# Altium PCB tuch-tara2.PcbDoc
Units mm, origin at the board's own origin, x right, y up, seen from the top; angles counter-clockwise.
Board outline 151 x 86.38 mm, 2 copper layers (Top Layer, Bottom Layer); 25 components, 18 nets, 78 pads, 0 vias.
Unrouted connection lines stored in the file: 6.
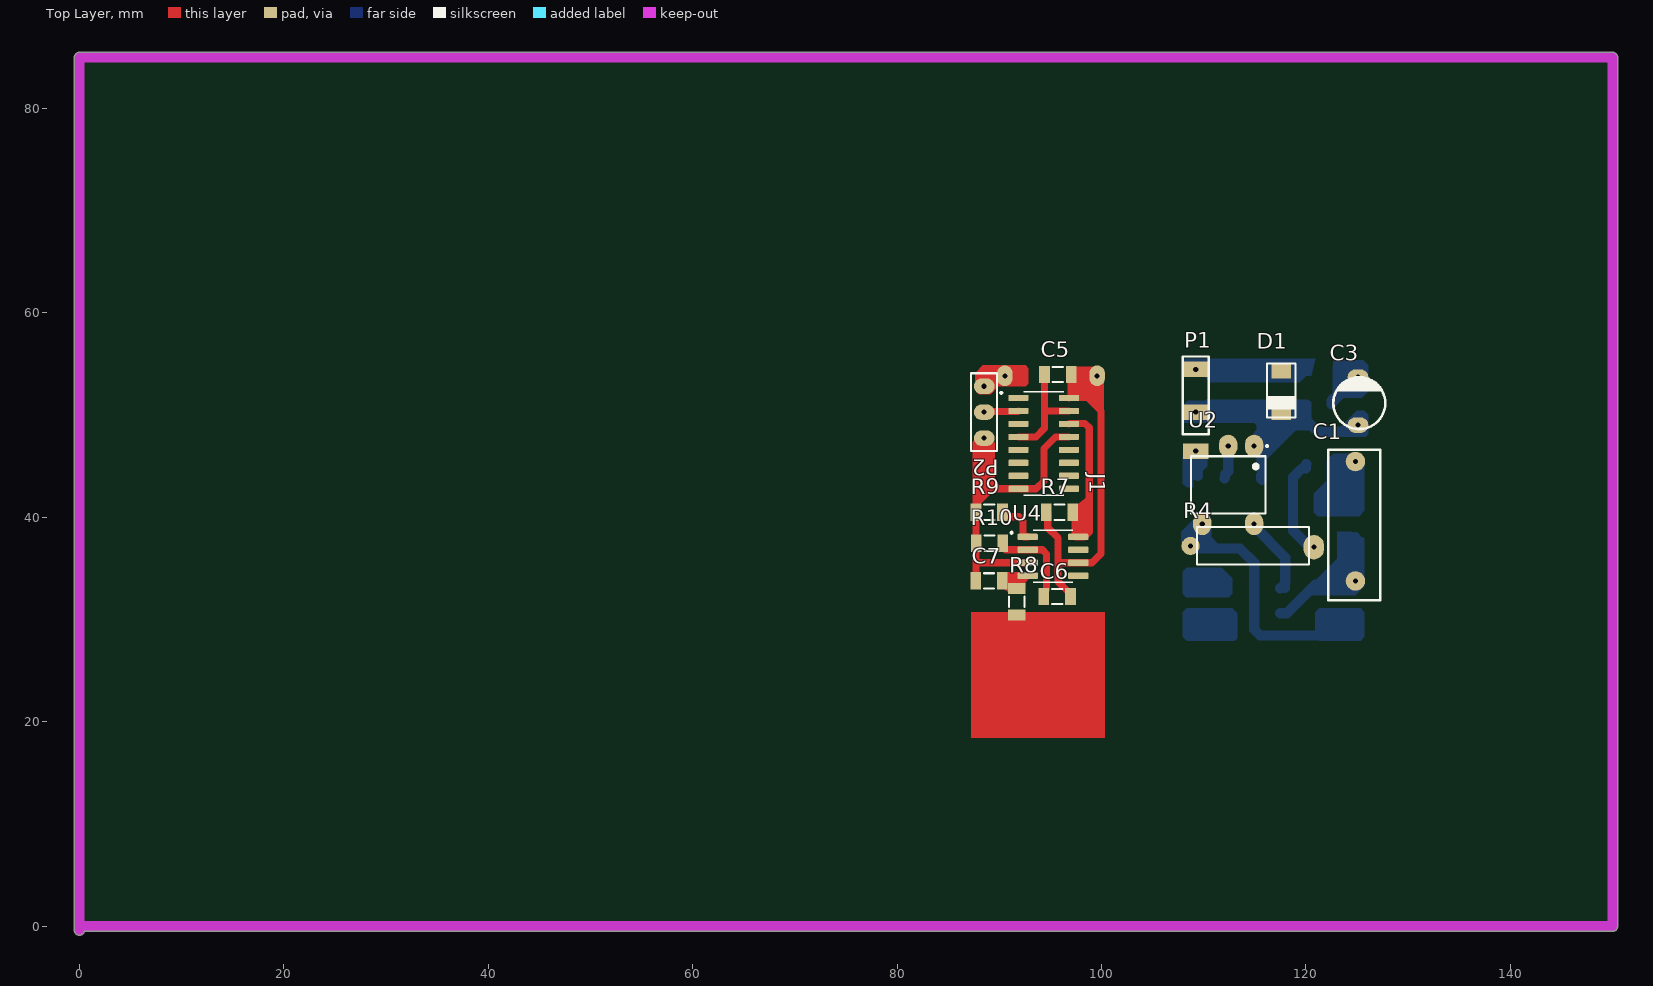
[diagram p0: Top Layer view]
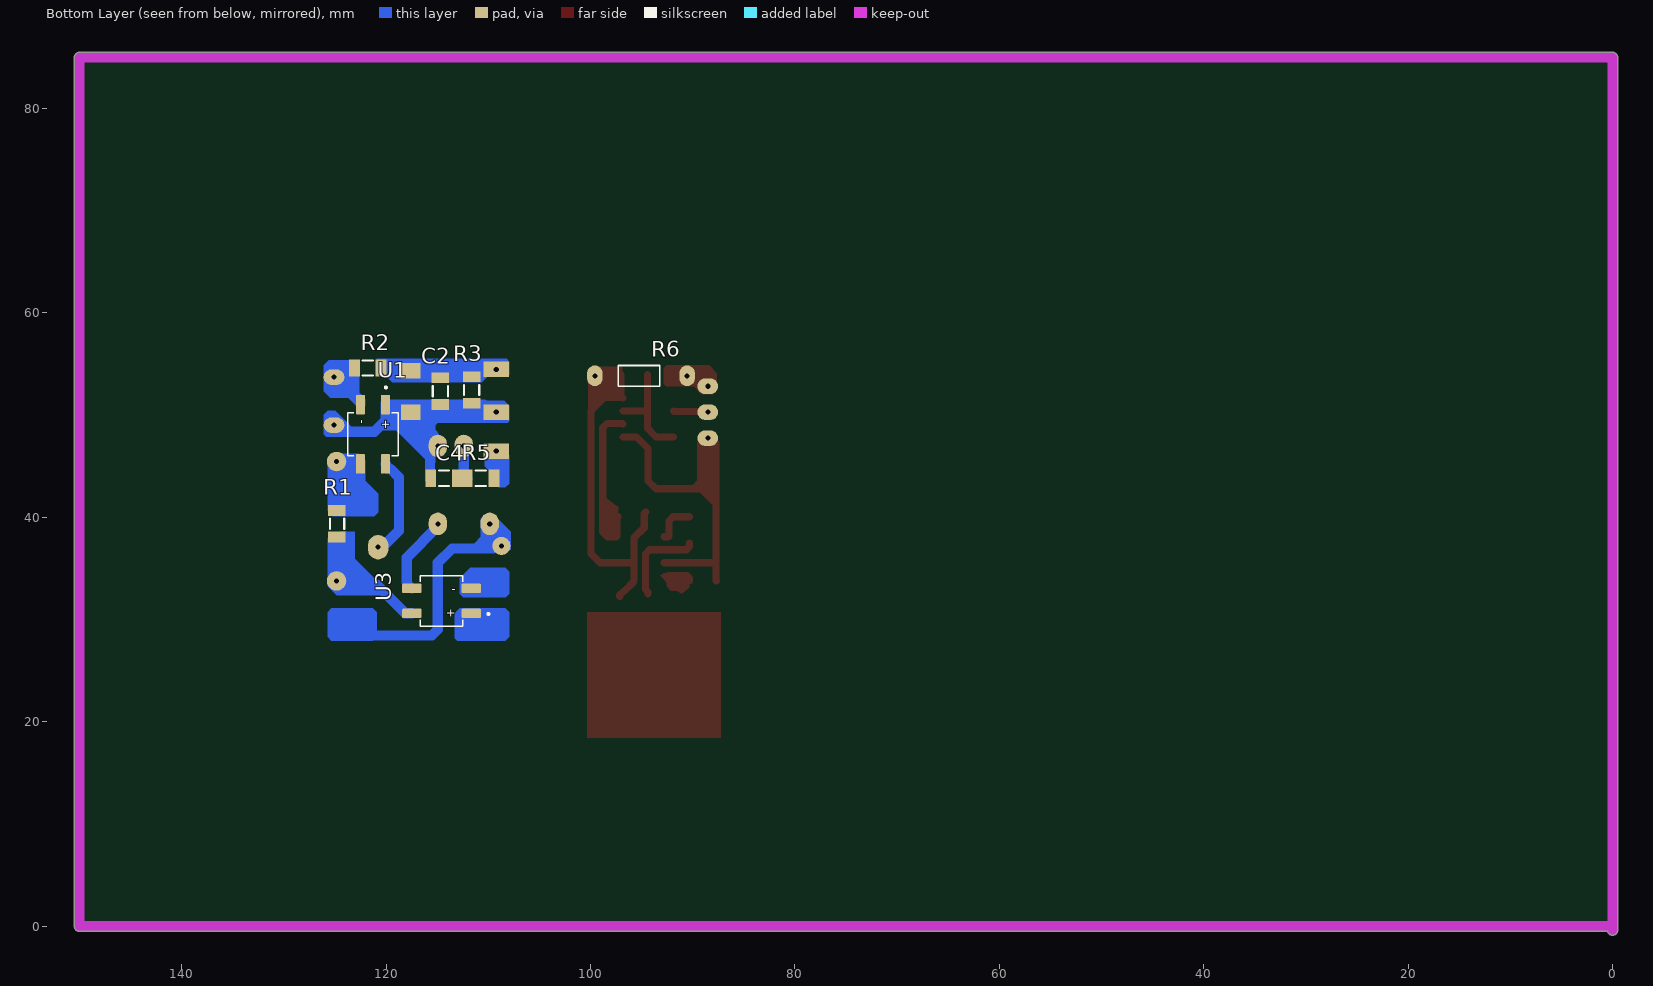
[diagram p1: Bottom Layer view, seen from below]
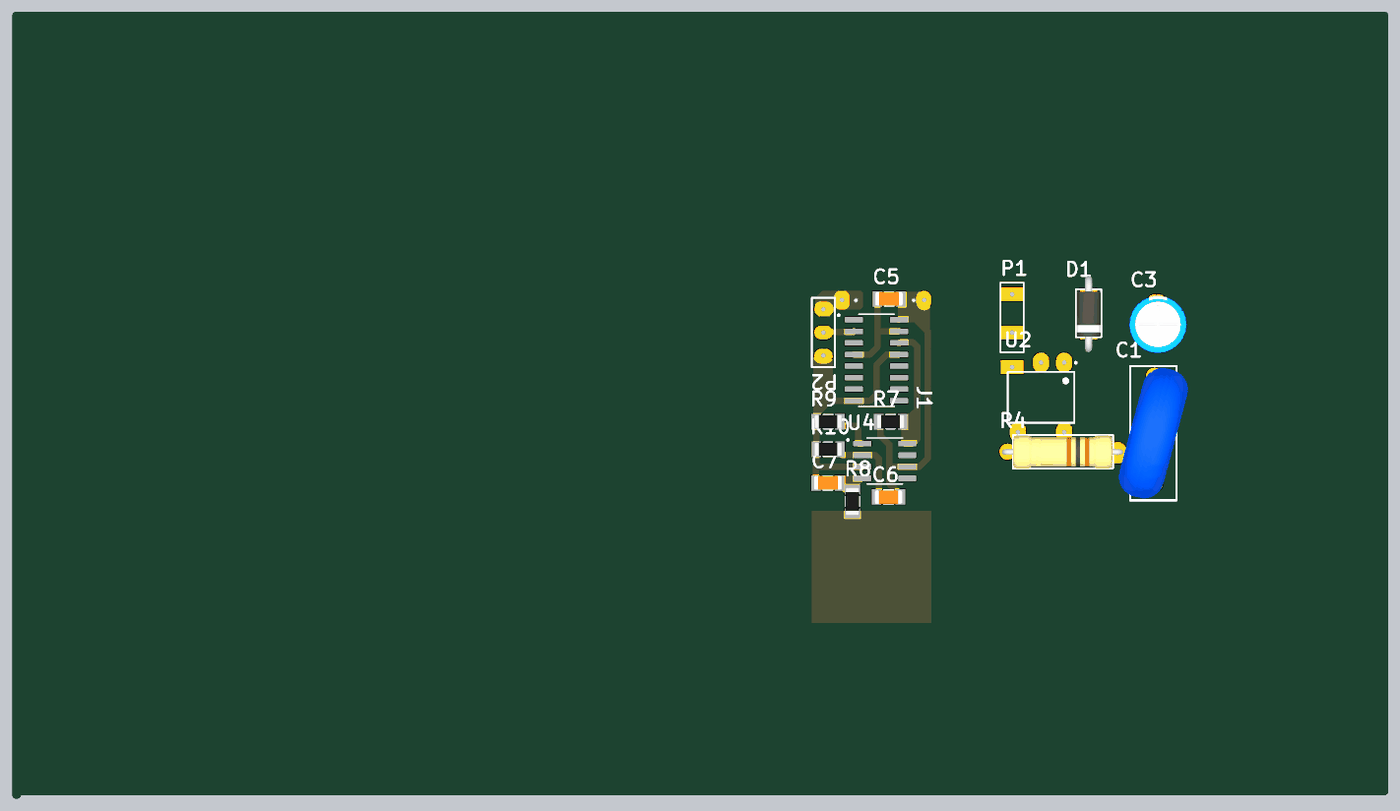
[diagram p2: 3D render of the assembled board from above, using the file's embedded part models]
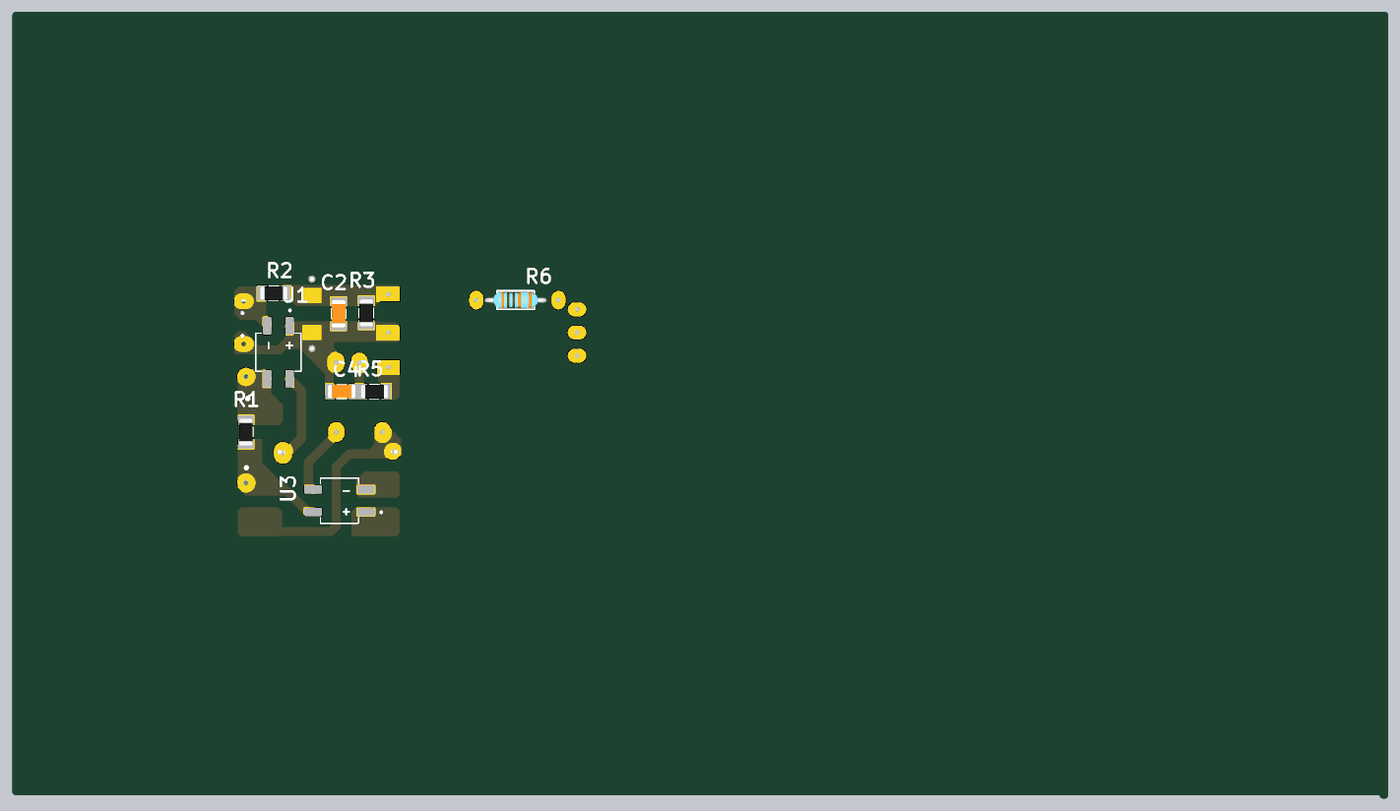
[diagram p3: 3D render of the assembled board from below, using the file's embedded part models]

## Layer stack, top to bottom
Top Solder: solder mask 0.0102, Solder Resist, Dk 3.5
Top Layer: signal copper 0.0356
Dielectric 1: dielectric 0.32, FR-4, Dk 4.8
Bottom Layer: signal copper 0.0356
Bottom Solder: solder mask 0.0102, Solder Resist, Dk 3.5

## Board outline
-0.5,-0.381 -0.5,85 cw(c0,85) 0,85.5 150,85.5 cw(c150,85) 150.5,85 150.5,0 cw(c150,0) 150,-0.5 0.486,-0.5 cw(c0,-0.381)

## Design rules (kind name [scope] priority, off if disabled: settings)
Clearance Clearance_1 [InPolygon] p1: gap=0.8 ignorepadtopadclearanceinfootprint=FALSE
Clearance [All] p2: gap=0.254 ignorepadtopadclearanceinfootprint=FALSE except(0: Arc-Hole Track-Hole SMDPad-Hole THPad-Hole Via-Hole Fill-Hole Poly-Hole Region-Hole Text-Hole)
PolygonConnect [All] p1: connectstyle=Relief reliefconductorwidth=0.254 reliefentries=4 polygonreliefangle="90 Angle" airgapwidth=0.254
RoomDefinition tuch-tara2 [InComponentClass('tuch-tara2')] p1: confinementstyle=ConfineIn formatcopy=TRUE lockcomponents=FALSE outline 144.907,-4.953 247.904,-4.953 247.904,23.114 144.907,23.114
RoutingLayers [All] p1: top layer_v5=FALSE bottom layer_v5=TRUE
RoutingVias [All] p1: holewidth=0.711 width=2.5 viastyle="Through Hole" minholewidth=0.711 minwidth=1.27 maxholewidth=0.711 maxwidth=2
SolderMaskExpansion [All] p1: expansion=0.102 istentingtop=FALSE
Width [All] p1: maxlimit=3 minlimit=0.5 preferedwidth=1
29 further rules are at their usual default settings.

## Components (designator, comment, footprint, x,y, rotation, side; value= is the part's Value field where it differs from the comment)
C1 "=Value" CAP-30 124.714,39.243 r90 top
C2 "=Value" "CAP 1206" 114.681,52.324 r90 bottom
C3 "=Value" ELEC-CAP-RAD10-20 125.222,51.181 r270 top
C4 "=Value" "CAP 1206" 114.3,43.815 r0 bottom
C5 "=Value" "CAP 1206" 95.758,53.975 r180 top
C6 "=Value" "CAP 1206" 95.631,32.258 r0 top
C7 "=Value" "CAP 1206" 89.027,33.782 r180 top
D1 "MODEL" DO-41 117.602,56.134 r270 top
J1 "-4017" SOIC127P600X175-16N 94.336,47.244 r0 top
P1 "Header 3" HDR1X3#1 109.22,54.483 r270 top
P2 "Header 3" HDR1X3#2 88.519,52.832 r270 top
R1 "10K" "RES 1206 (3216X08L)" 124.841,39.37 r270 bottom
R2 "10K" "RES 1206 (3216X08L)" 121.793,54.61 r180 bottom
R3 "10K" "RES 1206 (3216X08L)" 111.633,52.451 r90 bottom
R4 "10K" Res-(1/1) 121.158,37.211 r180 top
R5 "10K" "RES 1206 (3216X08L)" 110.744,43.815 r0 bottom
R6 "10K" Res-(1/4) 95.25,53.848 r180 bottom
R7 "10K" "RES 1206 (3216X08L)" 95.885,40.513 r0 top
R8 "10K" "RES 1206 (3216X08L)" 91.694,31.75 r90 top
R9 "10K" "RES 1206 (3216X08L)" 89.027,40.513 r180 top
R10 "10K" "RES 1206 (3216X08L)" 89.027,37.465 r0 top
U1 "MB6S" SOIC245P670X270-4N 121.285,48.133 r270 bottom
U2 "K3021P" DIP762W50P254L730H410Q6 112.395,43.18 r270 top
U3 "MB6S" SOIC245P670X270-4N 114.575,31.832 r0 bottom
U4 "LM555CM/NOPB" SOIC127P599X175-8N 95.25,36.195 r0 top

## Footprints (in the part's own frame and the unit in brackets; to place one, negate y for a bottom-side part, rotate by r counter-clockwise, add the part's x,y. Pads: shape width x height; smd on the part's side, far side on the other; paste and mask are expansions set on the pad)
"CAP 1206" [mm]
  rect 1.05x1.7 smd: 1(-1.27,0) 2(1.326,0)
  silkscreen extent -0.47,-0.75 0.53,0.75, body extent -1.49,-0.77 1.55,0.75, height 0.75
CAP-30 [mil]
  round 75 hole 19.68: 1(-215,-5) 2(245,-5)
  silkscreen extent -290,-100 290,100, body extent -301,-169 301,169, height 707
DIP762W50P254L730H410Q6 [mm]
  oval 2.2x1.79 hole 0.5: 1(-3.81,2.54) 2(-3.81,0) 4(3.81,-2.54) 6(3.81,2.54)
  silkscreen extent -3.9,-3.65 2.8,3.9
DO-41 [mm]
  rect 1.5x1.905 all layers, no hole: 1(1.778,0) 2(5.842,0)
  silkscreen extent 1.1,-1.5 6.35,1.5, body extent -0.41,-1.33 8,1.33, height 3.33
ELEC-CAP-RAD10-20 [mil]
  oval 60x80 hole 19.68: 1(-100,-5) 2(84.65,-5)
  silkscreen extent -100,-100 100,100, body extent -124,-124 124,124, height 404
HDR1X3#1 [mm] "Connector; Header; 3 Position"
  rect 1.524x2.5 hole 0.5: 1(0,0) 2(8.001,0) 3(4.191,0)
  silkscreen extent -1.27,-1.27 6.35,1.27
HDR1X3#2 [mm] "Connector; Header; 3 Position"
  oval 1.524x2.032 hole 0.5: 1(0,0) 2(2.54,0) 3(5.08,0)
  silkscreen extent -1.27,-1.27 6.35,1.27
"RES 1206 (3216X08L)" [mm] "Chip Resistor, 2-Leads, Body 3.2x1.6mm, IPC High Density _ (0.125 W)"
  rect 1.05x1.7 smd: 1(-1.295,0) 2(1.301,0)
  silkscreen extent -0.51,-0.64 0.5,0.75, body extent -1.52,-0.76 1.53,0.76, height 0.6
Res-(1/1) [mil]
  oval 78.74x94.49 hole 19.68: 1(15,5)
  round 70 hole 19.68: 2(490,0)
  silkscreen extent 34,-72 466,72, body extent -11,-71 514,73, height 151
Res-(1/4) [mil]
  oval 60x80 hole 19.68: 1(-170,0) 2(185,0)
  silkscreen extent -80,-40 80,40, body extent -135,-36 135,36, height 115
SOIC127P599X175-8N [mm]
  rrect25% 1.97x0.6 smd: 1(-2.47,1.905) 2(-2.47,0.635) 3(-2.47,-0.635) 4(-2.47,-1.905) 5(2.47,-1.905) 6(2.47,-0.635) 7(2.47,0.635) 8(2.47,1.905)
  silkscreen extent -4.14,-2.52 1.95,2.52
SOIC127P600X175-16N [mm]
  rrect25% 1.97x0.6 smd: 1(-2.475,4.445) 2(-2.475,3.175) 3(-2.475,1.905) 4(-2.475,0.635) 5(-2.475,-0.635) 6(-2.475,-1.905) 7(-2.475,-3.175) 8(-2.475,-4.445) 9(2.475,-4.445) 10(2.475,-3.175) 11(2.475,-1.905) 12(2.475,-0.635) 13(2.475,0.635) 14(2.475,1.905) 15(2.475,3.175) 16(2.475,4.445)
  silkscreen extent -4.24,-5.06 1.95,5.06
SOIC245P670X270-4N [mm]
  rrect23% 1.91x0.91 smd: 1(-2.9,1.225) 2(-2.9,-1.225) 3(2.9,-1.225) 4(2.9,1.225)
  silkscreen extent -4.68,-2.48 2.1,2.48

## Part data
C1 C2 C4 C5 C6 C7: library part Capacitor, "Capacitor"
C3: library part "Capacitor Electrolytic", "Electrolytic Capacitor"
D1: library part Diode, "Diode", MODEL=1N4148
J1: "10000pF Â±1% 25V Ceramic Capacitor C0G, NP0 0603 (1608 Metric)", Package="0603 Heyco", Availability=Warning, MF=Heyco, Mouser-Purchase-URL=https://snapeda.com/shop?store=Mouser&id=51486, MP=4017, Price=None, SnapEDA_Link=https://www.snapeda.com/parts/4017/Heyco/view-part/51486/?ref=snap
P1 P2: "Header, 3-Pin", LatestRevisionDate=17-Jul-2002, LatestRevisionNote="Re-released for DXP Platform.", Publisher="Altium Limited"
R1 R2 R3 R4 R5 R6 R7 R8 R9 R10: library part Resistor, "Resistor", Power="1/4 W", Tolerance=5%
U1 U3: "Bridge Rectifier Single Phase Standard 600V Surface Mount 4-SOIC", Package="BESOP-4 Surge Components", Digi-Key_Part_Number=MB6SCT-ND, Digi-Key_Purchase_URL=https://www.digikey.com.tr/product-detail/en/on-semiconductor/MB6S/MB6SCT-ND/965654?utm_source=snapeda&utm_medium=aggregator&utm_campaign=symbol, MF="ON Semiconductor", MP=MB6S, SnapEDA_Link=https://www.snapeda.com/parts/MB6S/ON%20Semiconductor/view-part/2774209/?ref=snap
U2: "Optoisolator Triac Output 5300Vrms 1 Channel 6-DIP", Package="DIP-6 Vishay", Availability=Unavailable, DigiKey-Purchase-URL=https://snapeda.com/shop?store=DigiKey&id=291595, MF="Vishay Semiconductor", Mouser-Purchase-URL=https://snapeda.com/shop?store=Mouser&id=291595, MP=K3021P, Price=None, SnapEDA_Link=https://www.snapeda.com/parts/K3021P/Vishay%20Semiconductor%20Opto%20Division/view-part/291595/?ref=snap
U4: "Highly Stable 555 Timer 8-SOIC 0 to 70", Package=None, Availability=Unavailable, MP=LM555CM/NOPB, Price=None

## Nets (pads, with @x,y where several pads share a name; then routed paths per layer and width w, separated by ;. In a path a pad name is that pad's centre, name@x,y a point inside that pad or via, vN(x,y) a via of type N, cw(c..) or ccw(c..) an arc to the next point about the centre after c; other vN are vias at no path point)
faz: R4.2 U2.4 | length 25.5
  Bottom Layer w1: R4.2 108.861,37.062 109.411,37.062 109.516,36.957 113.538,36.957 114.935,35.56 114.935,29.034 115.521,28.448 124.956,28.448 ; R4.2@108.861,37.957 109.855,38.951 U2.4
GND: C2.2 C7.2 D1.1 J1.8 J1.13 P1.1 P2.3 R2.2 R3.2 R9.2 R10.1 U4.3 | length 45.3
  Top Layer w0.7: C7.2 87.716,33.797 87.716,35.56 ; 87.726,35.853 R10.1@87.726,37.46 ; 87.726,42.605 87.726,40.259 R10.1@87.726,37.46 ; P2.3@87.726,47.278 87.726,42.799 J1.8 93.599,42.799 94.361,43.561 94.361,46.736 95.504,47.879 J1.13 ; R10.1 R10.1@87.726,37.46 ; U4.3 87.716,35.56 ; 87.716,35.56 87.716,35.853 87.716,37.45 R10.1@87.726,37.46
  Bottom Layer w1: P1.1@109.22,54.61 112.395,54.61 ; R3.2 119.149,53.752 120.134,54.737 R2.2@120.138,54.733 ; D1.1@117.475,54.737 D1.1@117.602,54.737
NetC1_2: C1.2 R1.1 U1.3 | length 7.3
  Bottom Layer w1: U1.3 122.51,45.304 122.555,45.35 124.725,45.35 C1.2 R1.1
NetC3_1: C3.1 R2.1 U1.2 | length 6.4
  Bottom Layer w1: U1.2 122.51,51.443 123.088,52.021 R2.1 123.088,54.285 123.113,54.26 123.438,54.26 123.877,53.821 124.995,53.821 C3.1
NetC4_1: C4.1 R5.2 U2.2 | length 3.3
  Bottom Layer w1: R5.2 112.07,43.84 112.07,44.165 112.395,44.49 U2.2
NetC5_2: C5.2 J1.4 J1.5 J1.6 J1.7 J1.15 | length 10.6
  Top Layer w0.7: J1.4 93.599,47.879 94.432,48.712 C5.2 ; 94.432,50.419 J1.15
NetC6_1: C6.1 R10.2 U4.2 | length 8.9
  Top Layer w0.7: R10.2 90.328,37.14 90.638,36.83 U4.2 94.205,36.83 94.615,36.42 94.615,32.964 94.361,32.71 C6.1@94.361,32.512
NetC7_1: C7.1 R8.2 U4.4 | length 4.5
  Top Layer w0.5: R8.2 92.019,33.051 92.294,33.326 92.294,34.24 92.344,34.29 U4.4
  Top Layer w0.7: C7.1 90.297,34.015 90.572,34.29 U4.4@92.344,34.29
NetJ1_14: J1.14 R7.2 U4.8 | length 15.9
  Top Layer w0.7: J1.14 96.859,49.197 98.396,49.197 98.806,48.787 98.806,38.601 98.305,38.1 97.459,38.1 97.409,38.15 97.409,39.965 R7.2@97.313,40.061
NetP2_1: P2.1 R6.2
NetR4_1: R4.1 U1.4 | length 10.4
  Bottom Layer w1: U1.4 120.015,45.188 120.015,44.778 119.605,44.778 118.745,43.918 118.745,38.692 120.777,36.66 R4.1@120.777,36.449
NetR9_1: R9.1 U4.1 | length 4.1
  Top Layer w0.7: R9.1@90.322,40.061 91.919,40.061 92.329,39.651 92.329,38.15 92.379,38.1 U4.1
NetU2_6: U2.6 U3.3 | length 8
  Bottom Layer w1: U2.6 114.935,39.116 117.983,36.068 117.983,33.643 117.93,33.59 117.93,33.102 117.52,33.102 U3.3
nol: C1.1 R1.2 U3.4 | length 13
  Bottom Layer w1: U3.4 117.486,30.618 118.121,30.618 120.904,33.401 123.82,33.401 124.028,33.609 124.668,33.609 C1.1 R1.2
o1: J1.2 P1.2 P2.2 R5.1 | length 5.9
  Top Layer w0.7: P2.2 88.596,50.369 91.811,50.369 J1.2
  Bottom Layer w1: P1.2 109.22,44.623 109.449,44.394 R5.1@109.449,44.069
o2: U3.1
oo1: U3.2
VCC: C2.1 C3.2 C4.2 C5.1 C6.2 D1.2 J1.16 P1.3 R3.1 R6.1 R7.1 U1.1 U2.1 U4.6 | length 69.5
  Top Layer w0.7: R7.1 94.742,40.361 94.742,38.989 95.758,37.973 95.758,35.56 ; J1.16 96.861,51.739 J1.16@97.028,51.739 ; C5.1 J1.16@97.028,51.739 ; C6.2@97.132,32.258 97.132,32.408 96.782,32.758 96.711,32.758 95.758,33.711 95.758,35.56 ; 95.758,35.56 U4.6 99.06,35.56 99.949,36.449 99.949,50.419 98.629,51.739 J1.16@97.028,51.739
  Bottom Layer w1: P1.3 P1.3@109.708,50.292 ; U2.1@114.935,47.143 114.935,47.409 115.33,47.804 115.33,48.02 D1.2@117.094,49.784 ; C4.2@115.626,44.069 C4.2 115.626,43.759 115.697,43.688 115.697,46.99 116.205,47.498 ; D1.2@117.602,50.038 119.507,50.038 121.158,48.387 124.055,48.387 124.699,49.031 C3.2 ; D1.2 117.352,50.042 116.835,50.042 116.831,50.038 115.062,50.038 114.808,50.292 P1.3@109.708,50.292 ; U1.1 110.449,51.033 P1.3@109.708,50.292
pads on no net: J1.1 J1.3 J1.9 J1.10 J1.11 J1.12 R8.1 U4.5 U4.7

## Polygon pours and split planes (outlines as drawn)
GND on Bottom Layer "GND_L02_P002" (solid, pour order 2): 116.332,39.751
no net on Bottom Layer "NONET_L02_P000" (solid, pour order 0): 91.059,37.973

## Keep-outs
Keep-Out Layer:
  lines w1: 0,-0.381 0,85 150,85 150,0 0,0

## Other copper
Top Layer:
  rectangle: 87.249,18.415 100.33,30.734
  region net NetP2_1: 87.63,53.213 87.63,54.102 88.392,54.864 92.583,54.864 92.837,54.61 92.837,53.086 92.583,52.832 89.916,52.832 89.154,52.07 88.011,52.07 87.757,52.324
  region net NetJ1_14: 97.282,41.021 97.485,41.123 98.679,42.051 98.679,38.474 98.305,38.1 98.28,38.125 97.434,38.125
  region net NetC7_1: 90.325,33.118 90.325,33.957 90.833,34.465 90.96,34.338 93.246,34.338 92.047,33.139 91.059,32.512
  region: 80.264,55.753
  region net VCC: 96.901,54.737 99.568,54.737 100.33,53.975 100.203,53.848 100.203,50.165 98.629,51.739 96.861,51.739
  region net GND: 89.598,42.989 89.598,42.735 88.011,41.148 87.63,41.529 87.63,42.926 88.289,43.585
  region net GND: 90.043,43.116 89.535,43.624 89.535,47.307 89.027,47.816 88.265,47.816 87.884,47.434 87.884,42.862 89.535,42.862 89.662,42.735
Bottom Layer:
  region net faz: 121.285,31.115 120.904,30.734 120.904,28.321 121.285,27.94 125.349,27.94 125.73,28.321 125.73,30.734 125.349,31.115
  region net faz: 107.823,36.83 107.823,38.608 109.474,40.259 110.363,40.259 110.744,39.878 110.744,38.1 111.887,36.83
  region net o1: 110.363,45.847 110.363,44.983 108.966,43.586 108.966,42.926 108.331,42.926 107.95,43.307 107.95,46.101
  region net oo1: 107.95,34.671 108.331,35.052 111.76,35.052 112.776,34.036 112.776,32.512 112.459,32.195 108.268,32.195 107.95,32.512
  region net o2: 113.284,30.607 112.776,31.115 108.331,31.115 107.95,30.734 107.95,28.321 108.331,27.94 113.03,27.94 113.284,28.194
  region net nol: 124.46,38.608 123.063,38.608 123.063,37.211 123.063,35.941 120.215,33.093 120.332,32.385 124.841,32.385 125.73,33.274 125.73,37.973
  region net NetC1_2: 122.682,46.228 124.587,46.228 125.73,45.085 125.73,40.64 125.222,40.132 121.158,40.132 120.777,40.513 120.777,42.291 122.047,43.561 122.047,45.593
  region net VCC: 123.317,48.768 124.968,50.419 125.73,50.419 126.111,50.038 126.111,48.133 125.857,47.879 122.174,47.879
  region net NetC3_1: 122.682,55.372 125.603,55.372 126.111,54.864 126.111,52.324 125.476,51.689 123.698,51.689 122.682,50.673
  region net VCC: 119.507,51.435 108.458,51.435 107.95,50.927 107.95,49.403 108.077,49.276 114.935,49.276 115.189,49.022 115.189,45.339 115.824,45.339 118.999,48.514 120.777,48.514 120.777,49.149 120.523,49.403 120.523,51.308
  region net GND: 120.904,55.499 108.204,55.499 107.95,55.245 107.95,53.975 108.077,53.848 109.982,53.848 110.617,53.213 119.38,53.213 120.015,53.848 120.523,53.848
  region: 122.936,50.292
  region: 123.444,44.45

## Text inside footprints (layer, text, board x,y; h text height)
U1: Bottom Overlay "+" at 120.395,49.532 h0.81 r90; Bottom Overlay "-" at 122.685,49.533 h0.81 r90
U3: Bottom Overlay "-" at 113.175,33.232 h0.81 r180; Bottom Overlay "+" at 113.176,30.942 h0.81 r180